# EAGLE board TemperatureModule (EAGLE 7.6.0)
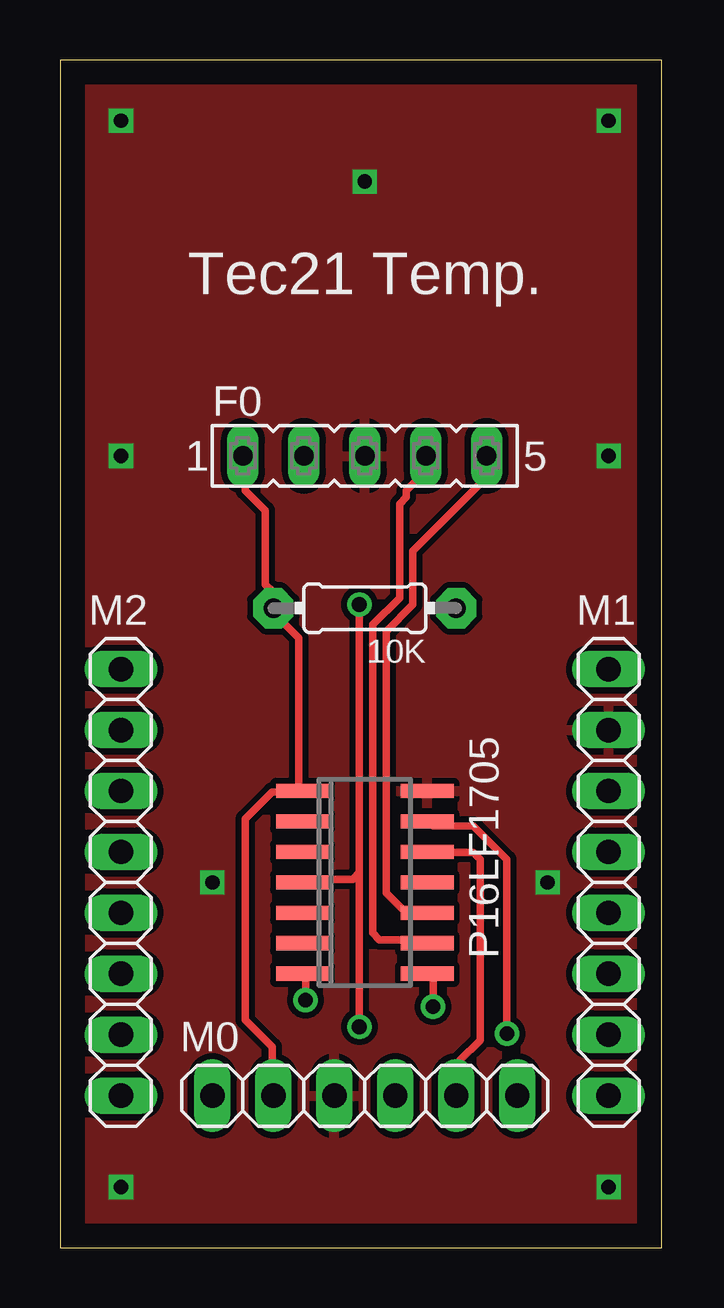
[diagram p0: board, top side]
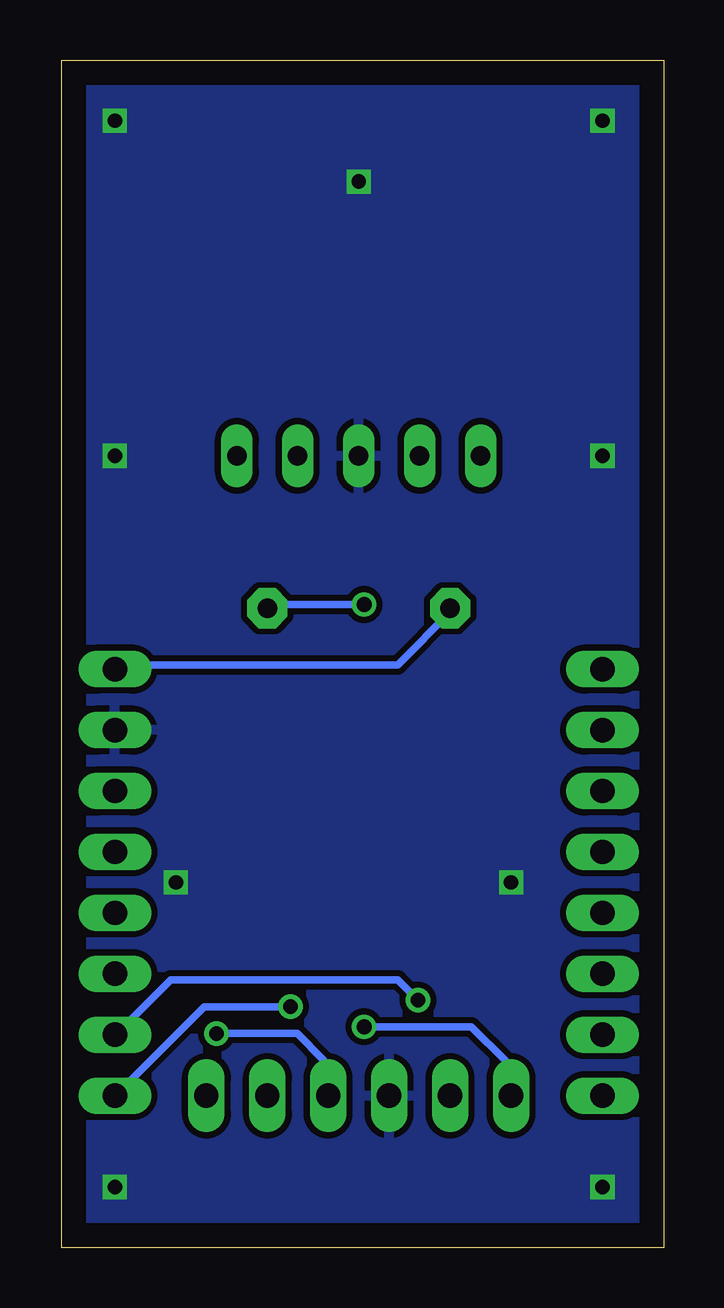
[diagram p1: board, bottom side, seen from below]

Size 25.07 x 49.52 mm. Coordinates in mm from the lower left corner, seen from the top.
Outline: 0,0 25.07,0 25.07,49.52 0,49.52 0,0
Copper layers (1*16): Top 0.035mm / dielectric 1.5mm / Bottom 0.035mm
Design rules "default": minimum track width 10mil, minimum drill 24mil, track to track 8mil, track to pad 8mil, pad to pad 8mil, via to via 8mil, smd to smd 8mil, copper to edge 40mil, drill to drill 8mil, minimum pad ring 10mil, minimum via ring 8mil, stop-mask expansion 4mil, vias tented up to drill 0mil, thermal gap 10mil
Net classes: 0 default: width 0.305 mm, drill 0.61 mm, clearance 0.254 mm

## Footprints (pad centres in the part's own frame; a part is rotated, then mirrored left to right if it is on the bottom)
0204/7 = drill 0.813 pad 1.676 octagon: 1 -3.81,0; 2 3.81,0
FE05-1 = drill 0.813 long: 1 -5.08,0; 2 -2.54,0; 3 0,0; 4 2.54,0; 5 5.08,0
1X06 = drill 1.016 long: 1 -6.35,0; 2 -3.81,0; 3 -1.27,0; 4 1.27,0; 5 3.81,0; 6 6.35,0
1X08 = drill 1.016 long: 1 -8.89,0; 2 -6.35,0; 3 -3.81,0; 4 -1.27,0; 5 1.27,0; 6 3.81,0; 7 6.35,0; 8 8.89,0
SO-14 = smd 0.6 x 2.2: 1 -3.81,-2.6; 2 -2.54,-2.6; 3 -1.27,-2.6; 4 0,-2.6; 5 1.27,-2.6; 6 2.54,-2.6; 7 3.81,-2.6; 8 3.81,2.6; 9 2.54,2.6; 10 1.27,2.6; 11 0,2.6; 12 -1.27,2.6; 13 -2.54,2.6; 14 -3.81,2.6

## Placement (x,y rotation side)
10K  10k  [0204/7]  12.7,26.67 180 top
F0  [FE05-1]  12.7,33.02 0 top
M0  [1X06]  12.7,6.35 0 top
M1  [1X08]  22.86,15.24 270 top
M2  [1X08]  2.54,15.24 270 top
P16LF1705  PIC16F676SL  [SO-14]  12.7,15.24 270 top

## Library data of the parts
10K = adafruit
F0 = con-lsta
M0 M1 M2 = pinhead
P16LF1705 = microchip; MF: MICROCHIP; MPN: PIC16F676-I/SL; OC_FARNELL: 9760520; OC_NEWARK: 92C4557

## Nets
CCL: M1.7 P16LF1705.7
CDA: M1.8 P16LF1705.8
GND: F0.3 M0.3 M1.2 P16LF1705.14
LCL: F0.5 P16LF1705.10
LDA: F0.4 P16LF1705.9
MCLR: 10K.1 M0.1 P16LF1705.4
O3: F0.2
PGC: M0.5 P16LF1705.12
PGD: M0.4 P16LF1705.13
VDD: 10K.2 F0.1 M0.2 M1.1 P16LF1705.1

## Tracks (layer width: path | path; a pad name or v marks a point on that pad's centre or on a via)
CCL  (via drill 0.61)
  Top 0.305: v10.24,10.34 10.24,11.18 P16LF1705.7
  Bottom 0.305: v10.24,10.34 11.07,11.18 20.52,11.18 22.76,8.94 22.61,8.94 M1.7
CDA  (via drill 0.61)
  Top 0.305: v15.54,10.06 15.54,11.18 P16LF1705.8
  Bottom 0.305: v15.54,10.06 19.13,10.06 22.76,6.43 22.61,6.43 M1.8
GND  (via drill 0.6)
  other vias: 2.54,46.99 2.54,33.02 2.54,2.54 22.86,2.54 22.86,33.02 22.86,46.99 12.7,44.45 6.35,15.24 20.32,15.24
  pour Top: -1.27,50.8 26.67,50.8 26.67,-1.27 -1.27,-1.27
  pour Bottom: -1.27,50.8 26.67,50.8 26.67,-1.27 -1.27,-1.27
LCL
  Top 0.305: P16LF1705.10 14.43,13.97 13.59,14.81 13.59,25.7 14.71,26.82 14.71,29.06 17.78,32.13 F0.5
LDA
  Top 0.305: P16LF1705.9 15.27,12.85 13.31,12.85 13.03,13.13 13.03,25.98 14.15,27.1 14.15,31.01 14.43,31.29 14.43,31.57 14.99,32.13 14.99,32.97 F0.4
MCLR  (via drill 0.61)
  Top 0.305: 12.47,15.65 12.19,15.37 10.24,15.37 P16LF1705.4 | v12.47,26.82 12.47,15.65 | 12.47,15.65 v12.47,9.22
  Bottom 0.305: v12.47,26.82 16.38,26.82 10K.1 | v12.47,9.22 8,9.22 6.6,7.82 6.6,6.43 M0.1
PGC
  Top 0.305: P16LF1705.12 15.54,16.48 17.22,16.48 17.5,16.2 17.5,8.66 16.66,7.82 16.66,6.43 M0.5
PGD  (via drill 0.61)
  Top 0.305: v18.62,8.94 18.62,16.2 17.22,17.6 15.54,17.6 P16LF1705.13
  Bottom 0.305: v18.62,8.94 15.27,8.94 14.15,7.82 14.15,6.43 M0.4
VDD
  Top 0.305: F0.1 7.72,32.97 7.72,31.57 8.56,30.73 8.56,27.66 8.84,27.38 8.84,26.82 10K.2 9.12,26.54 9.12,26.26 9.96,25.43 9.96,19.28 P16LF1705.1 9.96,19 8.84,19 7.72,17.88 7.72,9.5 8.84,8.38 8.84,6.43 M0.2
  Bottom 0.305: M1.1 21.34,24.31 11.07,24.31 8.84,26.54 10K.2

## Text on the board
tPlace: Tec21 Temp.